# EAGLE board Mini Spectrometer LED PCB (EAGLE 9.7.0)
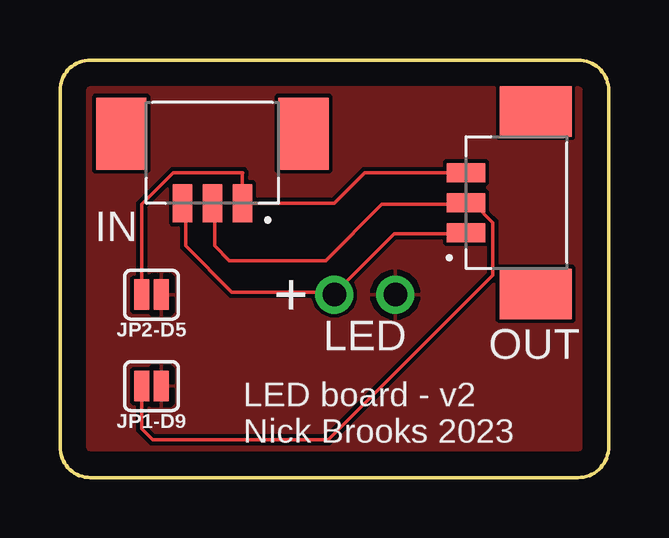
[diagram p0: board, top side]
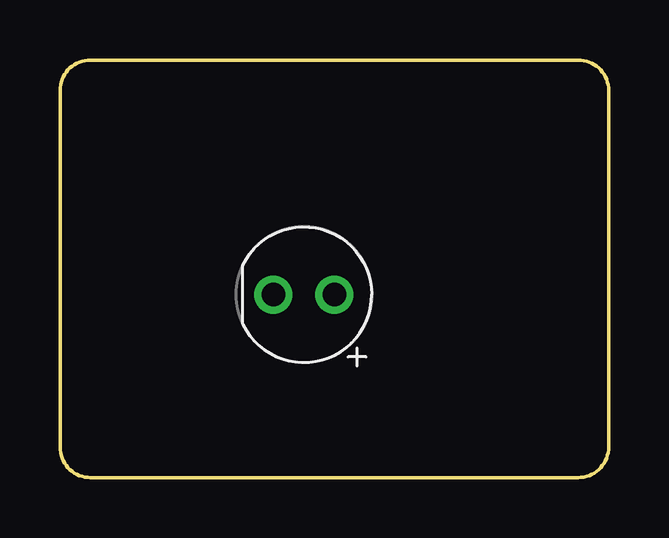
[diagram p1: board, bottom side, seen from below]

Size 22.86 x 17.4 mm. Coordinates in mm from the lower left corner, seen from the top.
Outline: 0,16.13 0,1.27 arc90 1.27,0 21.59,0 arc90 22.86,1.27 22.86,16.13 arc90 21.59,17.4 1.27,17.4 arc90 0,16.13
Copper layers (1*16): Top / Bottom
Stack-up Default Layer Stack: Top User Defined 0.035mm / Dielectric-1 User Defined 1.5mm / Bottom User Defined 0.035mm
Design rules "default": minimum track width 6mil, minimum drill 0.35mm, track to track 6mil, track to pad 6mil, pad to pad 6mil, via to via 6mil, smd to smd 6mil, copper to edge 40mil, drill to drill 6mil, minimum pad ring 10mil, minimum via ring 8mil, stop-mask expansion 4mil, vias tented up to drill 0mil, thermal gap 10mil

## Footprints (pad centres in the part's own frame; a part is rotated, then mirrored left to right if it is on the bottom)
MOLEX_53261-0371 = smd 0.8 x 1.6: 1 -1.25,0; 2 0,0; 3 1.25,0 | smd 2.1 x 3: P1 -3.8,-2.9; P2 3.8,-2.9
SMT-JUMPER_2_NO_SILK = smd 0.635 x 1.27: 1 -0.406,0; 2 0.406,0
LEDRD254W60D565H860B_W = drill 0.981 pad 1.581: 1 -1.27,0; 2 1.27,0

## Placement (x,y rotation side)
IN  53261-0371  [MOLEX_53261-0371]  6.35,11.43 180 top
JP1-D9  JUMPER-SMT_2_NO_SILK  [SMT-JUMPER_2_NO_SILK]  3.81,3.81 180 top
JP2-D5  JUMPER-SMT_2_NO_SILK  [SMT-JUMPER_2_NO_SILK]  3.81,7.62 180 top
LED  LED  [LEDRD254W60D565H860B_W]  12.7,7.62 180 bottom
OUT  53261-0371  [MOLEX_53261-0371]  16.92,11.46 90 top

## Library data of the parts
IN OUT = 53261-0371; MANUFACTURER: MOLEX
JP1-D9 JP2-D5 = SparkFun-Jumpers
LED = Opto-Electronic; CATEGORY: Opto-Electronic; SUB-CATEGORY: LED

## Nets
GND: JP1-D9.1 JP2-D5.1 LED.2
N$1: IN.3 LED.1 OUT.1
N$2: IN.2 JP1-D9.2 OUT.2
N$3: IN.1 JP2-D5.2 OUT.3

## Tracks (layer width: path | path; a pad name or v marks a point on that pad's centre or on a via)
GND
  Top 0.152: 4.32,3.91 JP1-D9.1
  pour Top: -1.27,17.78 -1.27,0 22.86,0 22.86,17.78
N$1
  Top 0.152: IN.3 5.23,11.38 5.23,9.65 7.16,7.72 11.33,7.72 LED.1 11.48,7.72 13.92,10.16 16.81,10.16 OUT.1
N$2
  Top 0.152: JP1-D9.2 3.4,2.03 3.86,1.58 11.18,1.58 18.03,8.43 18.03,10.62 17.27,11.38 16.97,11.38 OUT.2 16.81,11.38 13.41,11.38 11.07,9.04 7.06,9.04 6.45,9.65 6.45,11.38 IN.2
N$3
  Top 0.152: JP2-D5.2 3.4,11.38 4.72,12.7 7.62,12.7 7.6,12.68 IN.1 | 7.52,11.84 7.52,11.53 IN.1 | 16.81,12.6 OUT.3 16.81,12.6 16.71,12.7 12.7,12.7 11.43,11.43 IN.1

## Text on the board
tNames: + | LED board - v2 / Nick Brooks 2023